# Altium PCB WIFI_killer.PcbDoc
Units mm, origin at the board's own origin, x right, y up, seen from the top; angles counter-clockwise.
Board outline 30 x 30 mm, 2 copper layers (Top Layer, Bottom Layer); 12 components, 7 nets, 47 pads, 5 vias.
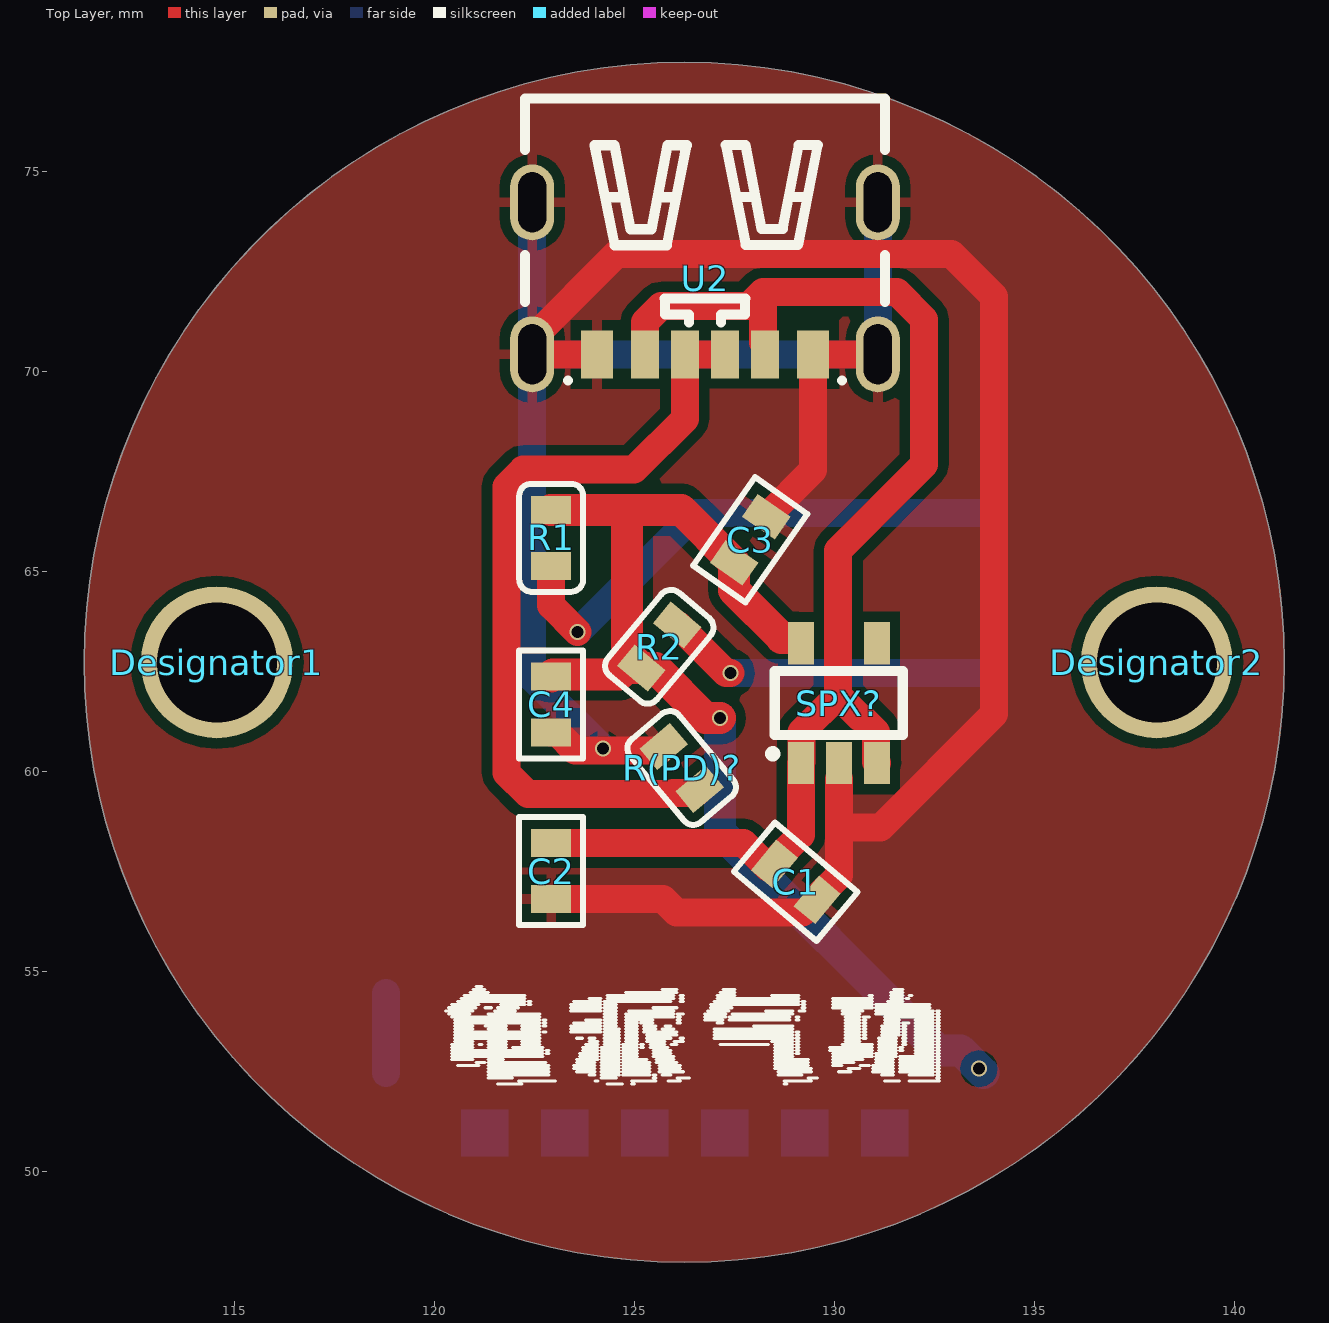
[diagram p0: Top Layer view]
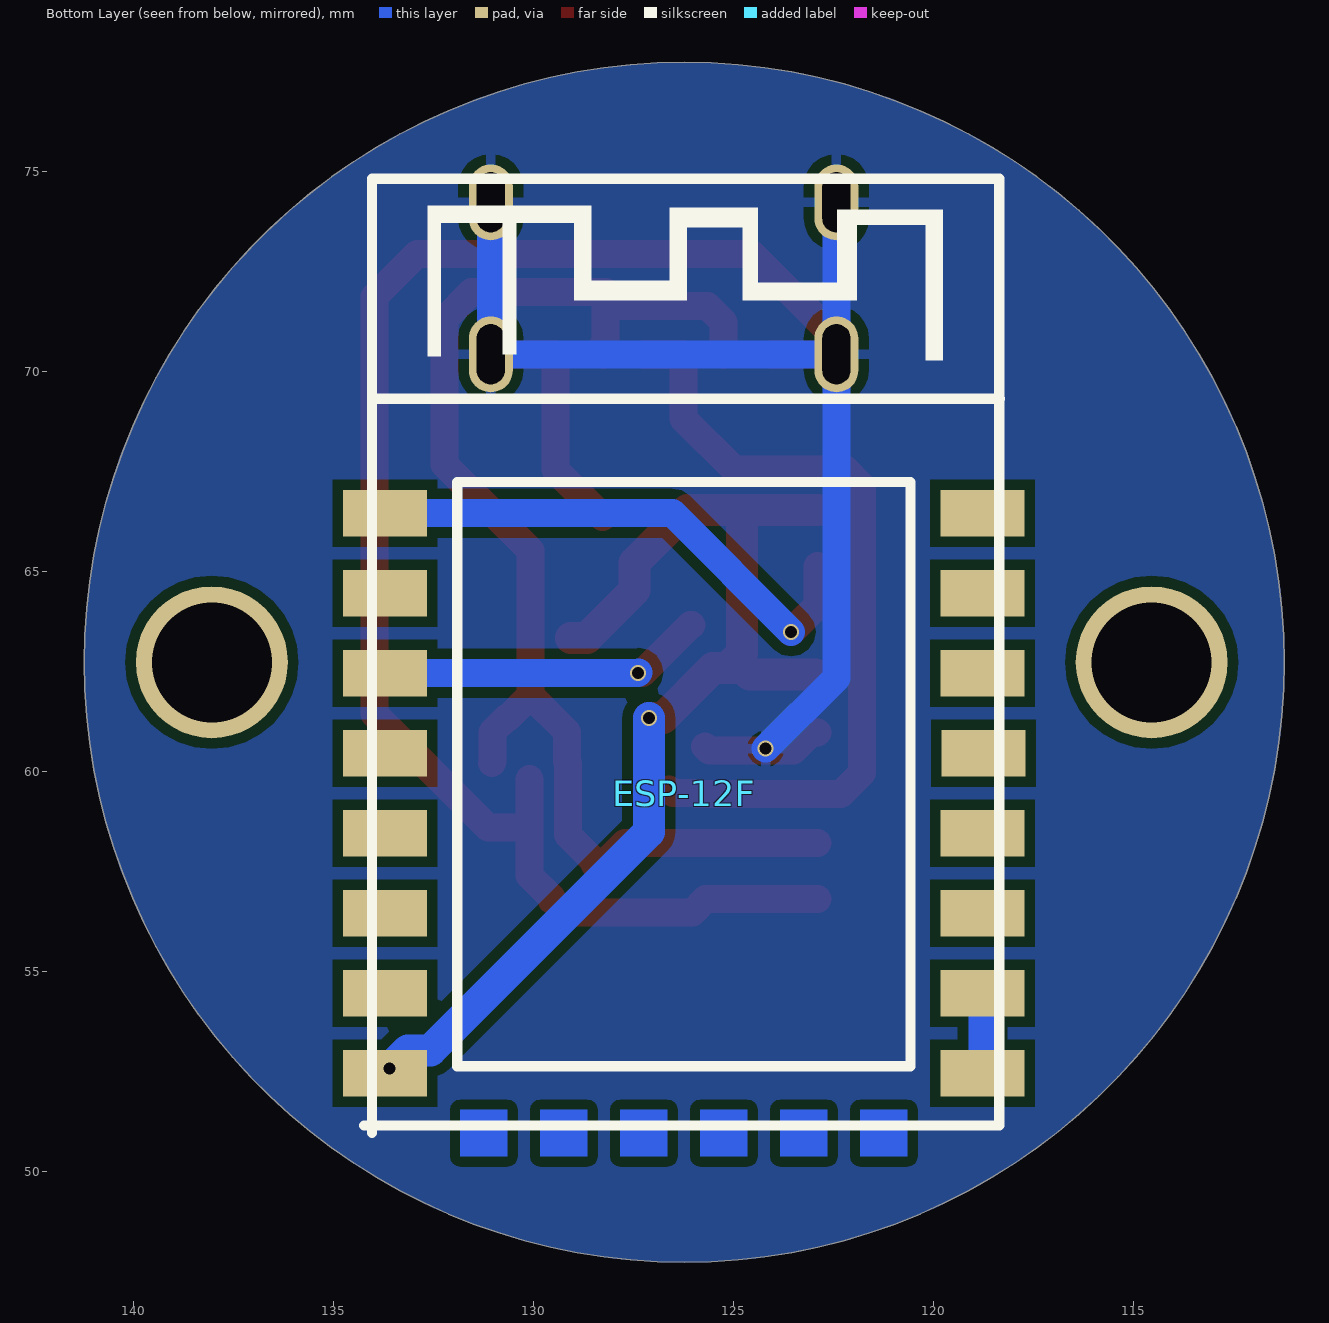
[diagram p1: Bottom Layer view, seen from below]
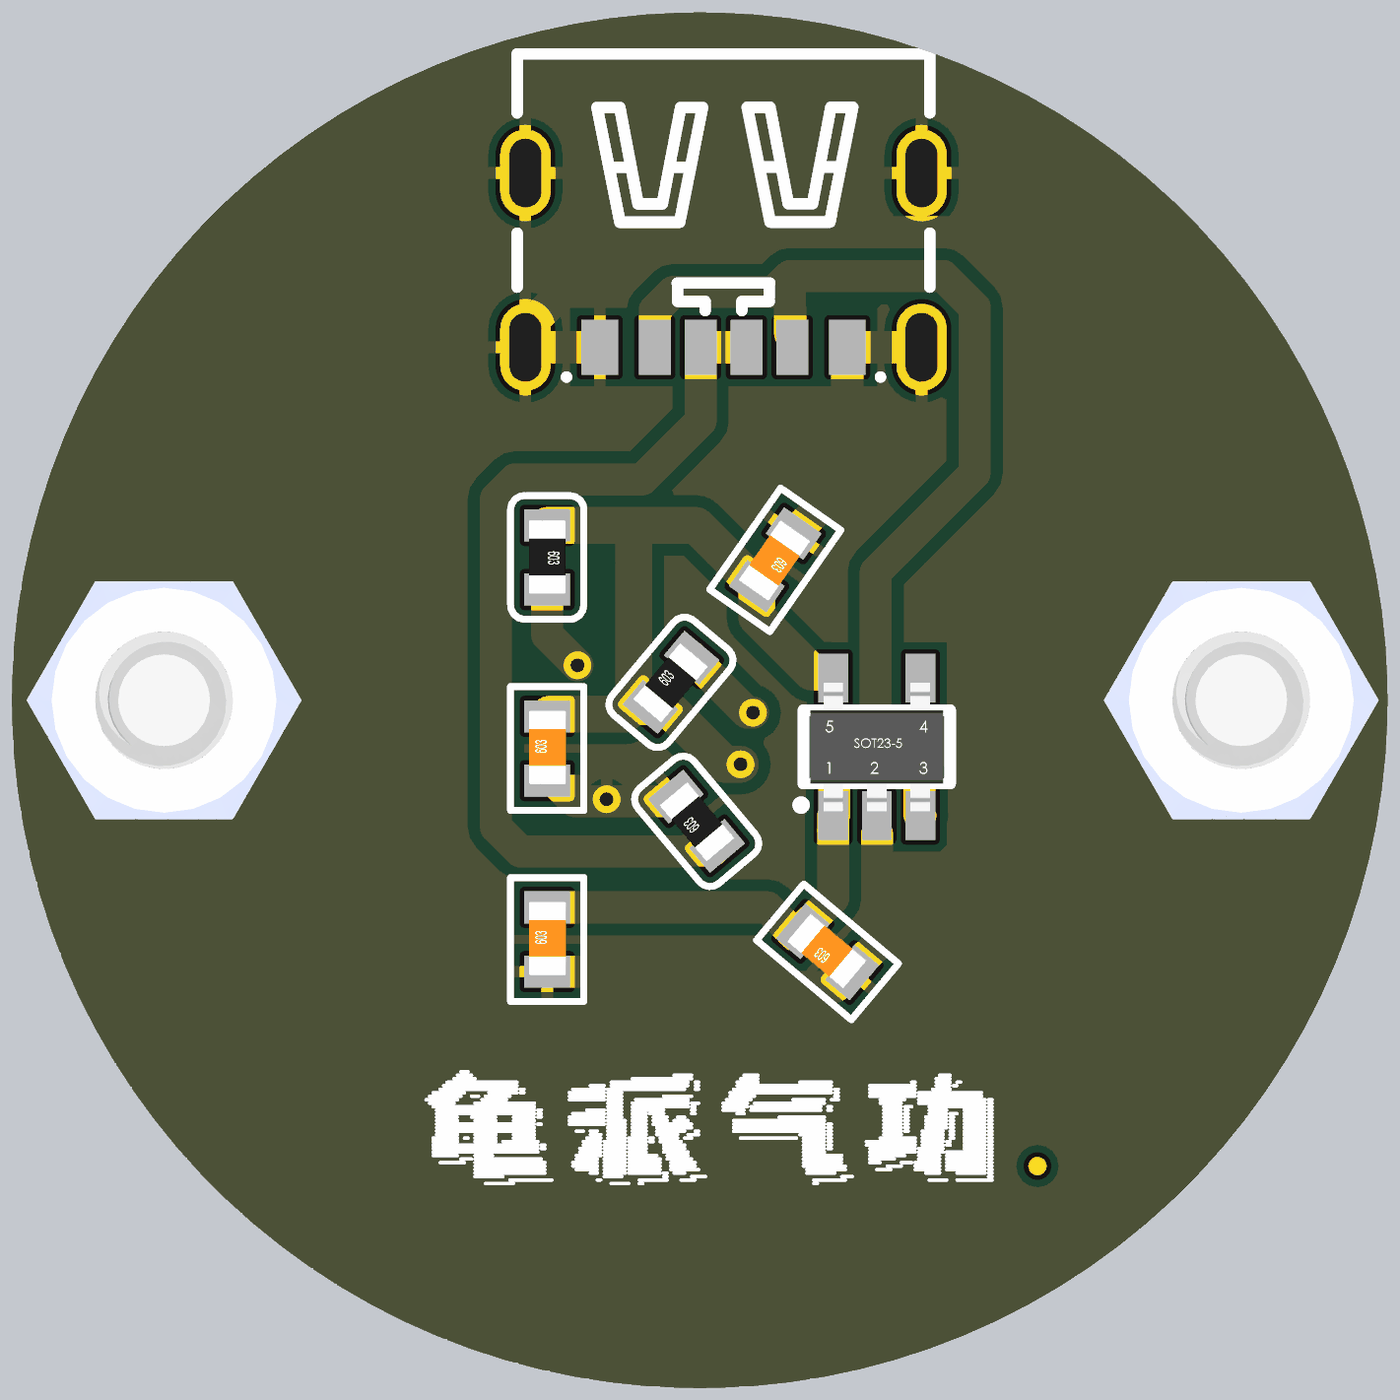
[diagram p2: 3D render of the assembled board from above, using the file's embedded part models]

## Layer stack, top to bottom
Top Solder: solder mask 0.0102, Solder Resist, Dk 3.5
Top Layer: signal copper 0.0356
Dielectric 1: dielectric 0.32, FR-4, Dk 4.8
Bottom Layer: signal copper 0.0356
Bottom Solder: solder mask 0.0102, Solder Resist, Dk 3.5

## Board outline
111.238,62.738 ccw(c126.238,62.738) 126.238,47.738 ccw(c126.238,62.738) 141.238,62.738 ccw(c126.238,62.738) 126.238,77.738 ccw(c126.238,62.738)

## Design rules (kind name [scope] priority, off if disabled: settings)
Clearance [All] p1: gap=0.254 ignorepadtopadclearanceinfootprint=FALSE except(0: Arc-Hole Track-Hole SMDPad-Hole THPad-Hole Via-Hole Fill-Hole Poly-Hole Region-Hole Text-Hole)
PolygonConnect [All] p1: connectstyle=Relief reliefconductorwidth=0.254 reliefentries=4 polygonreliefangle="90 Angle" airgapwidth=0.254
RoutingVias [All] p1: holewidth=0.711 width=1.27 viastyle="Through Hole" minholewidth=0.711 minwidth=1.27 maxholewidth=0.711 maxwidth=1.27
SolderMaskExpansion [All] p1: expansion=0.102 istentingtop=FALSE
Width [All] p1: maxlimit=2 minlimit=0.254 preferedwidth=0.6 minimp=50.000000 maximp=50.000000 favimp=50.000000
30 further rules are at their usual default settings.

## Classes and differential pairs
component class WIFI_killer: C1 C2 C3 C4 ESP-12F R1 R2 R(PD)? SPX? U2

## Components (designator, comment, footprint, x,y, rotation, side; value= is the part's Value field where it differs from the comment)
C1 "10uF" "0603 电容" 129.032,57.277 r140 top
C2 "100nF" "0603 电容" 122.936,57.531 r90 top
C3 "10uF" "0603 电容" 127.858,65.806 r235 top
C4 "100nF" "0603 电容" 122.936,61.697 r90 top
Designator1 "Comment" 铜柱 114.604,62.738 r0 top
Designator2 "Comment" 铜柱 138.099,62.738 r0 top
ESP-12F "ESP-12F" ESP-12F 126.238,62.738 r180 bottom locked
R1 "10K" "0603 电阻" 122.911,65.865 r270 top
R2 "10K" "0603 电阻" 125.603,63.119 r50 top
R(PD)? "5.1k" "0603 电阻" 126.178,60.088 r130 top
SPX? "SPX3819L" SPX3819 129.921,61.722 r90 top
U2 "TYPE_C_6PIN" TYPE_C_PIN 126.238,72.517 r180 top

## Footprints (in the part's own frame and the unit in brackets; to place one, negate y for a bottom-side part, rotate by r counter-clockwise, add the part's x,y. Pads: shape width x height; smd on the part's side, far side on the other; paste and mask are expansions set on the pad)
"0603 电容" [mm]
  rect 0.7x1 smd: 1(-0.711,0.025) 2(0.689,0.025)
  silkscreen extent -1.36,-0.77 1.34,0.83, body extent -0.79,-0.38 0.81,0.42, height 0.3
"0603 电阻" [mm]
  rect 0.7x1 smd: 1(-0.686,0) 2(0.714,0)
  silkscreen extent -1.34,-0.8 1.36,0.8, body extent -0.8,-0.4 0.8,0.4, height 0.3
ESP-12F [mil]
  rect 82.68x46.06 smd: 1(-294.5,146.81) 2(-294.5,68.07) 3(-294.5,-10.67) 4(-294.5,-89.41) 5(-294.5,-168.15) 6(-294.5,-246.89) 7(-294.5,-325.63) 8(-294.5,-404.37) 15(293.5,-404.37) 16(293.5,-325.63) 17(293.5,-246.89) 18(293.5,-168.15) 19(294.5,-89.41) 20(293.5,-10.67) 21(293.5,68.07) 22(293.5,146.81)
  Top Layer region: -220.34,-486.26 -220.34,-440.59 -174.28,-440.59 -174.28,-486.26
  Top Layer region: -141.6,-486.26 -141.6,-440.59 -95.54,-440.59 -95.54,-486.26
  Top Layer region: -62.86,-486.26 -62.86,-440.59 -16.8,-440.59 -16.8,-486.26
  Top Layer region: 15.88,-486.26 15.88,-440.59 61.94,-440.59 61.94,-486.26
  Top Layer region: 94.62,-486.26 94.62,-440.59 140.68,-440.59 140.68,-486.26
  Top Layer region: 173.36,-486.26 173.36,-440.59 219.42,-440.59 219.42,-486.26
  silkscreen extent -315,-463 311,476, body extent -314,-463 316,482, height 104
SPX3819 [mil]
  rect 41.8x25.6 smd: 1(-59.1,30.39) 2(-59.1,-7.01) 3(-59.1,-44.41) 4(59,-44.41) 5(59,30.39)
  silkscreen extent -53,-70 31,60, body extent -55,-64 55,50, height 43
TYPE_C_PIN [mm]
  oval 1.1x1.899 hole 0.7 slot 1.5 at 90 deg: 7(-4.838,-1.72) 7(-4.838,2.08) 7(3.802,-1.72) 7(3.802,2.08)
  rect 0.7x1.2 smd: A5(-1.018,2.08) A9(0.982,2.08) B5(-0.018,2.08) B9(-2.018,2.08)
  rect 0.8x1.2 smd: A12(2.182,2.08) B12(-3.218,2.08)
  silkscreen extent -5.02,-4.32 3.98,2.73, body extent -5.21,-4.45 4.45,3.05, height 3
铜柱 [mm]
  round 3.8 hole 3: 0(-0.05,0)
  body extent -3.05,-2.6 2.95,2.6, height 5.49

## Part data
C1 C2 C3 C4: library part "电容 无极"
R1 R2 R(PD)?: library part 电阻
SPX?: library part SPX3819LM

## Via types
v1: diameter 0.4, hole 0.3, Top Layer to Bottom Layer, 5 vias

## Nets (pads, with @x,y where several pads share a name; then routed paths per layer and width w, separated by ;. In a path a pad name is that pad's centre, name@x,y a point inside that pad or via, vN(x,y) a via of type N, cw(c..) or ccw(c..) an arc to the next point about the centre after c; other vN are vias at no path point)
3V3: C3.2 C4.2 ESP-12F.8 R1.1 R2.1 SPX?.5 | length 28.8
  Top Layer w0.8: C4.2 122.961,62.435 124.611,62.435 124.769,62.594 R2.1 ; R1.1 124.968,66.551 ; v1(127.127,61.341) 126.771,61.341 125.518,62.594 R2.1 ; SPX?.5@129.074,63.351 128.673,63.351 127.483,64.541 C3.2 126.16,66.551 124.968,66.551 ; 124.968,66.551 124.8,66.383 124.8,62.956 R2.1
  Bottom Layer w0.8: v1(127.127,61.341) 127.127,58.498 132.586,53.039 133.146,53.039 ESP-12F.8
  other v1: 133.604,52.578
+VUSB: C1.2 C2.2 SPX?.1 SPX?.3 U2.A9 U2.B9 | length 33.1
  Top Layer w0.7: C2.2 127.716,58.22 128.332,57.604 128.392,57.604 C1.2 128.488,57.76 129.149,58.421 SPX?.1 129.17,60.242 129.17,61.002 130.078,61.91 ; U2.A9 125.256,71.241 125.656,71.641 127.856,71.641 128.206,71.99 ; U2.B9 128.256,70.687 128.21,70.733 128.21,71.287 128.206,71.291 128.206,71.641 128.206,71.99 ; SPX?.3 131.028,60.242 131.028,61.002 130.674,61.356 130.633,61.356 130.078,61.91 ; 128.206,71.99 131.554,71.99 132.23,71.314 132.23,67.688 130.078,65.536 130.078,61.91
GND: C1.1 C2.1 C3.1 C4.1 R(PD)?.2 SPX?.2 U2.7 U2.A12 U2.B12 | length 76.1
  Top Layer w0.7: C2.1 125.707,56.82 126.039,56.488 C1.1@129.189,56.488 ; C4.1 123.061,60.985 123.507,60.539 125.623,60.539 125.719,60.635 ; U2.A12 122.436,70.437 122.436,70.837 124.544,72.944 132.923,72.944 133.985,71.882 133.985,61.447 131.148,58.61 130.103,58.61 ; C3.1 129.456,67.544 U2.B12 U2.7@131.076,70.437 ; C1.1 129.56,56.86 130.103,57.403 130.103,58.61 ; SPX?.2@130.103,59.817 130.103,58.61
  Bottom Layer w0.7: U2.7@122.436,74.237 U2.7@122.436,70.437 ; v1(124.206,60.579) 122.436,62.349 U2.7@122.436,70.437 ; U2.7@131.076,70.437 U2.7@122.436,70.437 ; U2.7@131.076,70.437 U2.7@131.076,74.237
NetESP-12F_1: ESP-12F.1 R1.2 | length 13.3
  Top Layer w0.7: R1.2 122.911,64.16 v1(123.571,63.5)
  Bottom Layer w0.7: v1(123.571,63.5) 126.538,66.467 ESP-12F.1
NetESP-12F_3: ESP-12F.3 R2.2 | length 8.2
  Top Layer w0.7: R2.2 126.081,63.666 127.28,62.467 v1(127.398,62.467)
  Bottom Layer w0.7: v1@127.381,62.484 v1(127.398,62.467) ESP-12F.3
NetESP-12F_15: ESP-12F.15 ESP-12F.16 | length 2
  Bottom Layer w0.7: ESP-12F.15 ESP-12F.16
NetR(PD)?_1: R(PD)?.1 U2.A5 U2.B5 | length 20
  Top Layer w0.7: 126.619,59.563 126.523,59.467 125.959,59.467 125.934,59.442 122.324,59.442 121.793,59.973 121.793,67.137 122.211,67.555 124.985,67.555 126.256,68.826 U2.B5 U2.A5
pads on no net: Designator1.0 Designator2.0 ESP-12F.2 ESP-12F.4 ESP-12F.5 ESP-12F.6 ESP-12F.7 ESP-12F.17 ESP-12F.18 ESP-12F.19 ESP-12F.20 ESP-12F.21 ESP-12F.22 SPX?.4

## Polygon pours and split planes (outlines as drawn)
GND on Top Layer "GND_L01_P000" (solid, pour order 0): 111.238,62.738 ccw(c126.238,62.738) 126.238,47.738 ccw(c126.238,62.738) 141.238,62.738 ccw(c126.238,62.738) 126.238,77.738 ccw(c126.238,62.738)
GND on Bottom Layer "GND_L02_P001" (solid, remove dead copper, pour order 1): 111.238,62.738 ccw(c126.238,62.738) 126.238,47.738 ccw(c126.238,62.738) 141.238,62.738 ccw(c126.238,62.738) 126.238,77.738 ccw(c126.238,62.738)

## Silkscreen, mask and mechanical layers (free items; w line width, h text height)
Top Overlay:
  drawing of 349 lines, arcs and shapes, not listed
Mechanical 1:
  circle w0.254: c126.238,62.738 r15